# Altium PCB MCU_PCB_CH340.PcbDoc
Units mm, origin at the board's own origin, x right, y up, seen from the top; angles counter-clockwise.
Board outline 70.36 x 37.85 mm, 2 copper layers (Top Layer, Bottom Layer), stack 1.671 mm thick; 33 components, 26 nets, 130 pads, 156 vias.
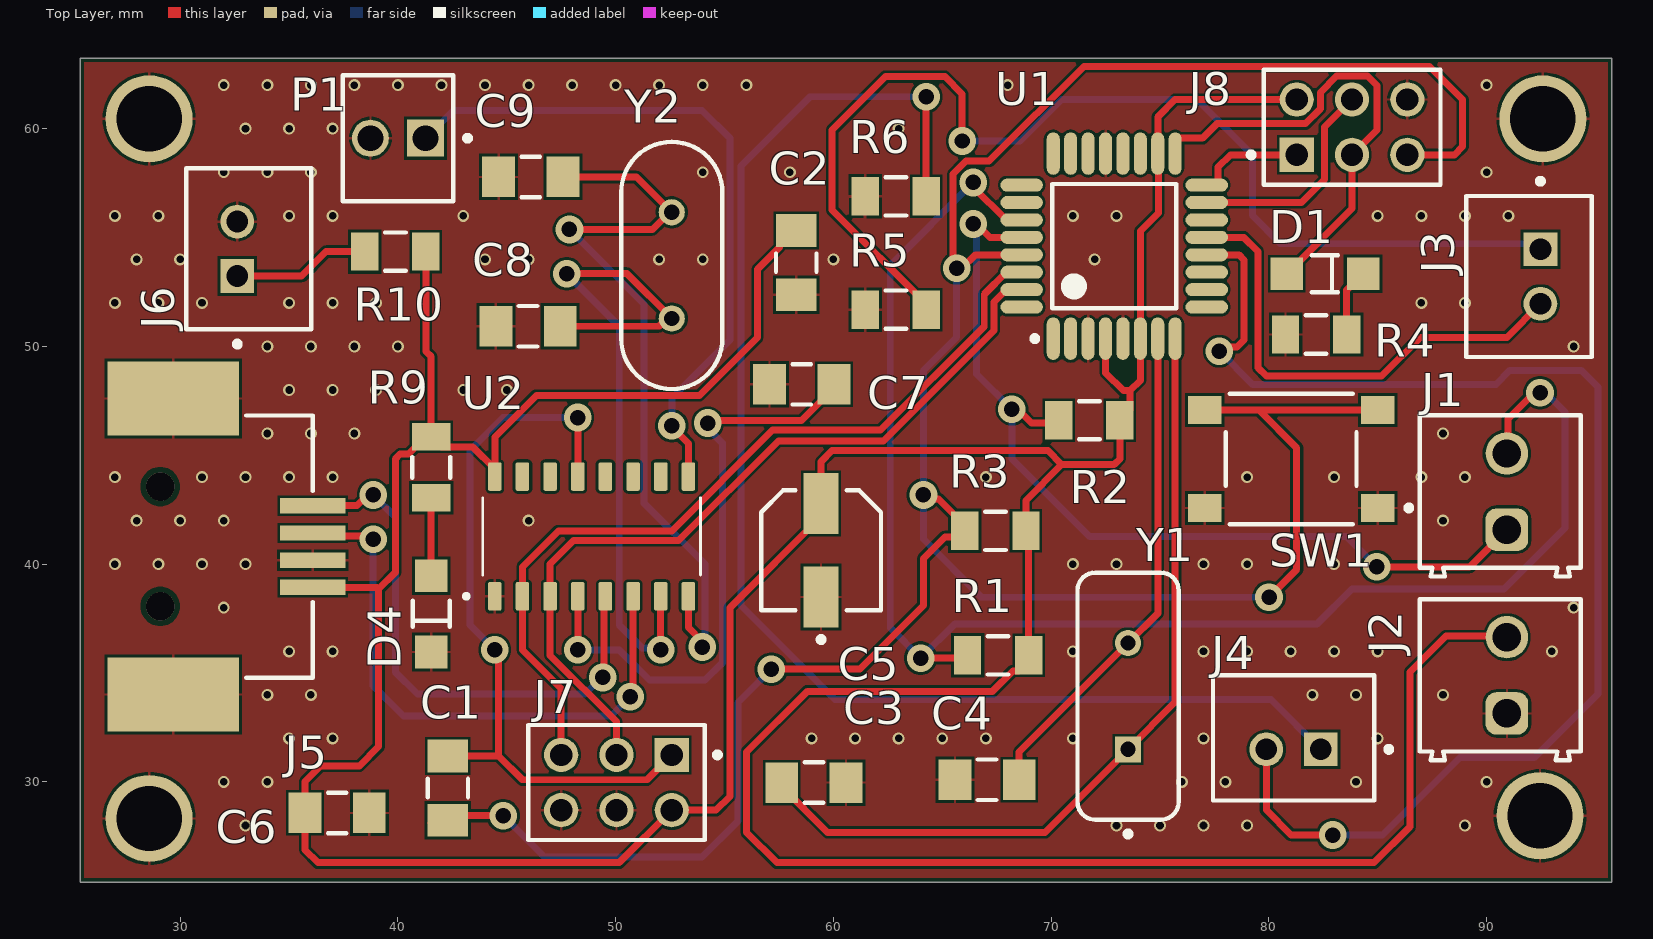
[diagram p0: Top Layer view]
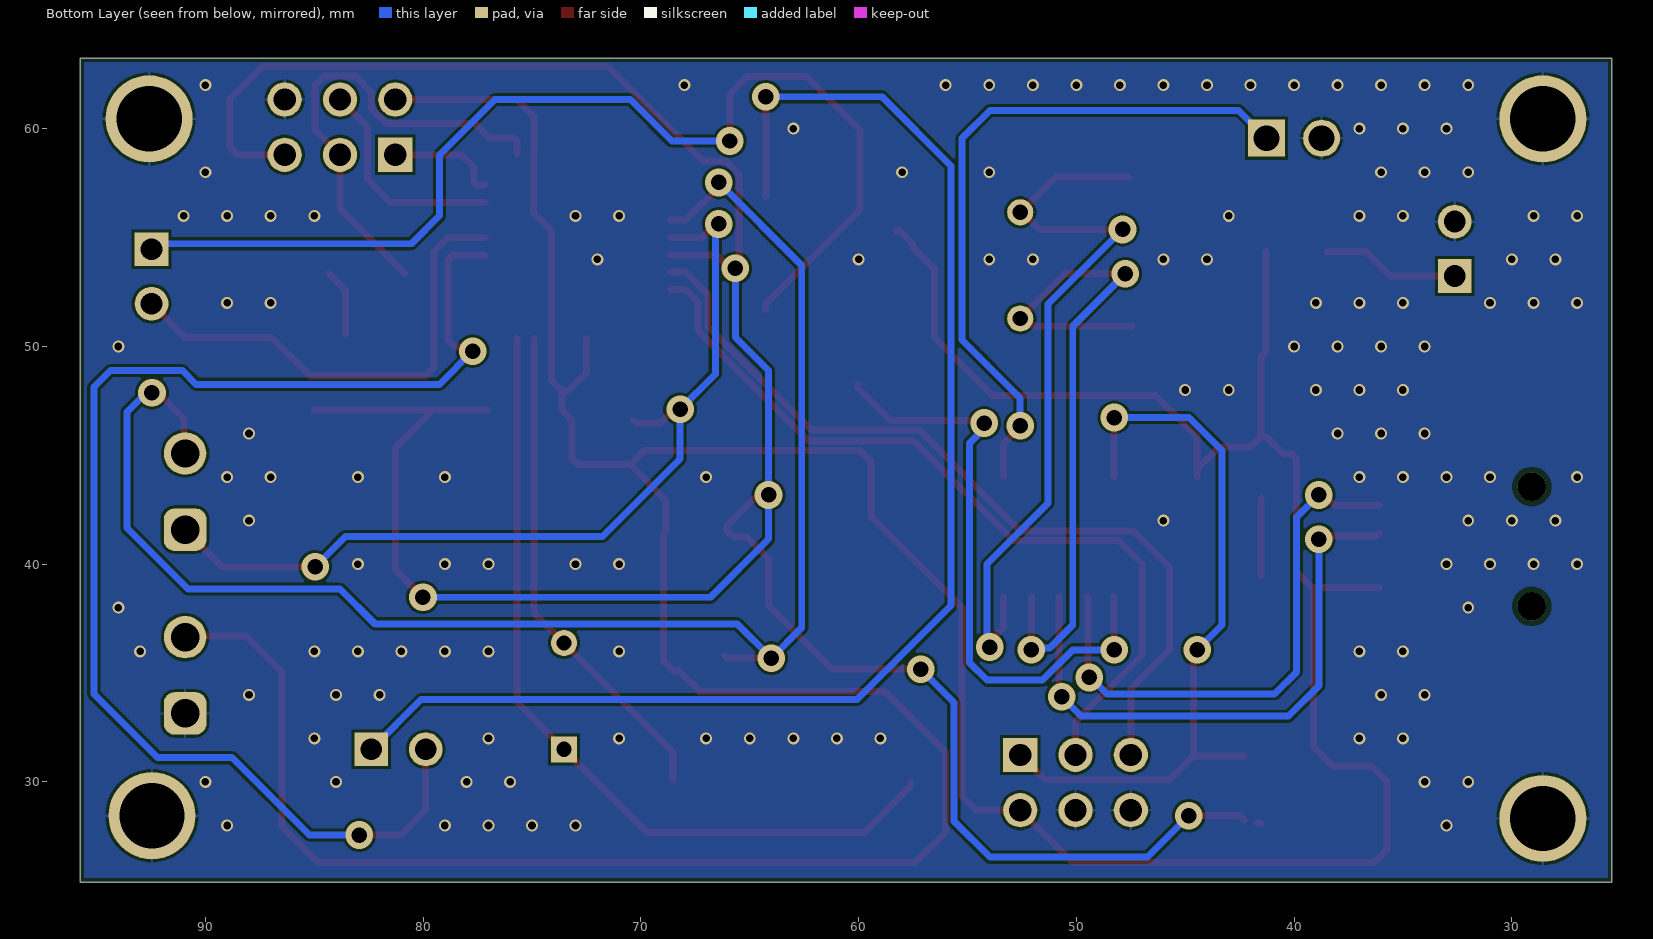
[diagram p1: Bottom Layer view, seen from below]
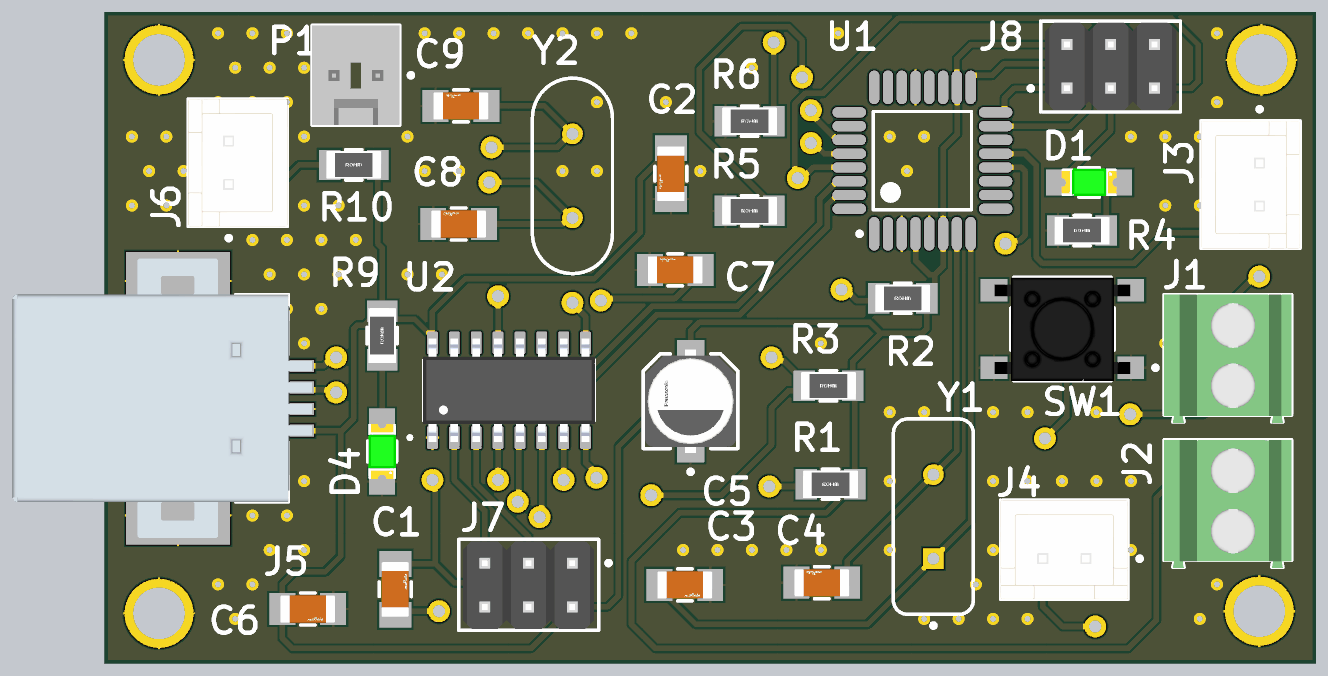
[diagram p2: 3D render of the assembled board from above, using the file's embedded part models]

## Layer stack, top to bottom
Top Solder: solder mask 0.0102, Solder Resist, Dk 3.5
Top Layer: signal copper 0.0356
Dielectric 1: dielectric 1.6, FR-4, Dk 4.8
Bottom Layer: signal copper 0.0356
Bottom Solder: solder mask 0.0102, Solder Resist, Dk 3.5

## Board outline
25.4,25.4 95.758,25.4 95.758,63.246 25.4,63.246

## Design rules (kind name [scope] priority, off if disabled: settings)
BoardOutlineClearance [All] p1: gap=0.2 ignorepadtopadclearanceinfootprint=FALSE
Clearance [All] p1: gap=0.127 ignorepadtopadclearanceinfootprint=FALSE except(0.25: Arc-Hole Track-Hole SMDPad-Hole THPad-Hole Via-Hole Fill-Hole Poly-Hole Region-Hole Text-Hole)
ComponentClearance [All] p1: gap=0.127 collisioncheckmode=3 verticalgap=0.127 showdistances=TRUE
DiffPairsRouting [All] p1: maxlimit=0.254 minlimit=0.127 mostfreqgap=0.127 toplayer_minwidth=0.127 toplayer_maxwidth=25.4 toplayer_prefwidth=0.127 bottomlayer_minwidth=0.127 bottomlayer_maxwidth=25.4 bottomlayer_prefwidth=0.127 maxuncoupledlength=12.7
Height [All] p1: minheight=0 maxheight=1816.048 prefheight=12.7
HoleSize [All] p1: absolutevalues=TRUE maxlimit=6.3 minlimit=0.3 maxpercent=80.000 minpercent=20.000
HoleToHoleClearance [All] p1: gap=0.25 allowstackedmicrovias=FALSE
MinimumAnnularRing [All] p1: minimumring=0.076
MinimumSolderMaskSliver [All] p1: minsoldermaskwidth=0
PlaneClearance [All] p1: clearance=0.127
PlaneConnect PlaneConnectPowerPads [InPadClass('PowerPads')] p1: planeconnectstyle=Direct reliefexpansion=0.508 reliefentries=4 reliefconductorwidth=0.254 reliefairgap=0.254
PlaneConnect [All] p2: pad.planeconnectstyle=Relief pad.reliefexpansion=0.3 pad.reliefentries=4 pad.reliefconductorwidth=0.127 pad.reliefairgap=0.127 via.planeconnectstyle=Direct via.reliefexpansion=0.3 via.reliefentries=4 via.reliefconductorwidth=0.127 via.reliefairgap=0.127
PolygonConnect PolygonConnectPowerPads [All vs (InPadClass('PowerPads'))] p1: connectstyle=Direct reliefconductorwidth=0.254 reliefentries=4 polygonreliefangle="90 Angle" airgapwidth=0.254
PolygonConnect [All] p2: thpad.connectstyle=Relief thpad.reliefconductorwidth=0.127 thpad.reliefentries=4 thpad.polygonreliefangle="90 Angle" thpad.airgapwidth=0.127 smdpad.connectstyle=Relief smdpad.reliefconductorwidth=0.127 smdpad.reliefentries=4 smdpad.polygonreliefangle="90 Angle" smdpad.airgapwidth=0.127 via.connectstyle=Direct via.reliefconductorwidth=0.127 via.reliefentries=4 via.polygonreliefangle="90 Angle" via.airgapwidth=0.127
RoutingVias [All] p1: holewidth=0.3 width=0.6 viastyle="Through Hole" minholewidth=0.3 minwidth=0.6 maxholewidth=0.6 maxwidth=6.6
SilkToSilkClearance [All] p1: silktosilkclearance=0
SilkToSolderMaskClearance [IsPad] p1: minsilkscreentomaskgap=0.127 clearancetoexposedcopper=TRUE
SolderMaskExpansion [All] p1: expansion=0.075 istentingtop=FALSE
Width [All] p1: maxlimit=25.4 minlimit=0.127 preferedwidth=0.127 minimp=50.000000 maximp=50.000000 favimp=50.000000
20 further rules are at their usual default settings.

## Classes and differential pairs
component class MCU: C1 C2 C3 C4 D1 J1 J2 J3 J4 J8 R1 R2 R3 R4 R5 R6 SW1 U1 Y1
component class CH340: C5 C6 C7 C8 C9 D4 J5 J6 J7 P1 R9 R10 U2 Y2

## Components (designator, comment, footprint, x,y, rotation, side; value= is the part's Value field where it differs from the comment)
C1 "GRM31M1X1H104JA01L" FP-GRM31M-0_15-IPC_A 42.291,29.718 r90 top
C2 "GRM31M1X1H104JA01L" FP-GRM31M-0_15-IPC_A 58.293,53.848 r270 top
C3 "GRM31M1X1H104JA01L" FP-GRM31M-0_15-IPC_A 59.103,29.972 r0 top
C4 "GRM31M1X1H104JA01L" FP-GRM31M-0_15-IPC_A 67.056,30.099 r180 top
C5 "EEE1VA100SR" FP-SC-MFG 59.436,40.64 r90 top
C6 "GRM31M1X1H104JA01L" FP-GRM31M-0_15-IPC_A 37.211,28.575 r0 top
C7 "GRM31M1X1H104JA01L" FP-GRM31M-0_15-IPC_A 58.547,48.26 r180 top
C8 "GRM31M1X1H104JA01L" FP-GRM31M-0_15-IPC_A 45.974,50.927 r180 top
C9 "GRM31M1X1H104JA01L" FP-GRM31M-0_15-IPC_A 46.101,57.785 r180 top
D1 "HSMG-C150" FP-HSMG-C150-MFG 82.578,53.34 r180 top
D4 "HSMG-C150" FP-HSMG-C150-MFG 41.529,37.719 r90 top
J1 "691214110002" 691214110002 90.632,43.335 r90 top
J2 "691214110002" 691214110002 90.632,34.897 r90 top
J3 "B2B-XH-A(LF)(SN)" FP-B2B-XH-A_LF_SN-MFG 91.948,53.213 r270 top
J4 "B2B-XH-A(LF)(SN)" FP-B2B-XH-A_LF_SN-MFG 81.133,32.021 r180 top
J5 "62910416121" 62910416121 28.083,40.811 r270 top
J6 "B2B-XH-A(LF)(SN)" FP-B2B-XH-A_LF_SN-MFG 33.147,54.483 r90 top
J7 "M20-9980346" FP-M20-9980346-MFG 50.038,29.972 r180 top
J8 "M20-9980346" FP-M20-9980346-MFG 83.82,60.071 r0 top
P1 "22-27-2021" MOLX-22-27-2021_V 40.005,59.563 r180 top
R1 "MCR18EZPF30R0" FP-MCR18-IPC_B 67.564,35.814 r0 top
R2 "MCR18EZPF30R0" FP-MCR18-IPC_B 71.755,46.609 r0 top
R3 "MCR18EZPF30R0" FP-MCR18-IPC_B 67.441,41.529 r0 top
R4 "MCR18EZPF30R0" FP-MCR18-IPC_B 82.169,50.546 r0 top
R5 "MCR18EZPF30R0" FP-MCR18-IPC_B 62.865,51.689 r0 top
R6 "MCR18EZPF30R0" FP-MCR18-IPC_B 62.865,56.896 r0 top
R9 "MCR18EZPF30R0" FP-MCR18-IPC_B 41.529,44.45 r90 top
R10 "MCR18EZPF30R0" FP-MCR18-IPC_B 39.882,54.356 r0 top
SW1 "PTS645SM43SMTR92LFS" FP-PTS645SM43SMTR92LFS-MFG 81.026,44.831 r180 top
U1 "ATmega328P-AU" 32A_M 72.898,54.61 r90 top
U2 "CH340G" SOIC127P600X180-16N 48.895,41.275 r90 top
Y1 "FOXSLF/160-20" FOX-FOXSLF160-20 73.533,33.936 r90 top
Y2 "FOXSLF/120-20" FOX-FOXSLF-2_V 52.578,53.721 r90 top value=12MHz

## Footprints (in the part's own frame and the unit in brackets; to place one, negate y for a bottom-side part, rotate by r counter-clockwise, add the part's x,y. Pads: shape width x height; smd on the part's side, far side on the other; paste and mask are expansions set on the pad)
32A_M [mm] "Thin QFP, 32-Leads, Body 7x7mm, Pitch 0.8mm, IPC Low Density"
  oval 1.95x0.6 smd: 1(-4.25,2.8) 2(-4.25,2) 3(-4.25,1.2) 4(-4.25,0.4) 5(-4.25,-0.4) 6(-4.25,-1.2) 7(-4.25,-2) 8(-4.25,-2.8) 17(4.25,-2.8) 18(4.25,-2) 19(4.25,-1.2) 20(4.25,-0.4) 21(4.25,0.4) 22(4.25,1.2) 23(4.25,2) 24(4.25,2.8)
  oval 0.6x1.95 smd: 9(-2.8,-4.25) 10(-2,-4.25) 11(-1.2,-4.25) 12(-0.4,-4.25) 13(0.4,-4.25) 14(1.2,-4.25) 15(2,-4.25) 16(2.8,-4.25) 25(2.8,4.25) 26(2,4.25) 27(1.2,4.25) 28(0.4,4.25) 29(-0.4,4.25) 30(-1.2,4.25) 31(-2,4.25) 32(-2.8,4.25)
  silkscreen extent -4.37,-2.85 2.85,3.77, body extent -3.5,-3.5 3.5,3.5, height 1.2
62910416121 [mm] "USB 2.0 Type B SMT Horizontal"
  rect 0.7x3 smd: 1(1.875,8) 2(-0.625,8) 3(-1.875,8) 4(0.625,8)
  round 1.3 hole 1.3 unplated: MH1(-2.75,1) MH2(2.75,1)
  rect 3.4x6.04 smd: Shell(-6.8,1.6) Shell(6.8,1.6)
  silkscreen extent -6.02,4.95 6.02,8, body extent -8.1,-8 8.1,9.39, height 11.16
691214110002 [mm] "3.50 mm Horizontal Entry Modular, 2p"
  rrect50% 1.95x1.95 hole 1.3: 1(-1.75,-0.3)
  round 1.95 hole 1.3: 2(1.75,-0.3)
  silkscreen extent -3.9,-3.7 3.5,3.7, body extent -3.95,-3.7 3.5,3.7, height 8.55
FOX-FOXSLF160-20 [mm] "THD, 2-Leads, Body 11.35x4.65mm"
  rect 1.2x1.2 hole 0.7: 1(-2.44,0)
  round 1.2 hole 0.7: 2(2.44,0)
  silkscreen extent -6.45,-2.32 5.68,2.32, body extent -5.67,-2.32 5.68,2.33, height 3.6
FOX-FOXSLF-2_V [mm] "THD, 2-Leads, Body 11.35x4.65mm, Pitch 4.88mm"
  round 1.2 hole 0.7: 1(-2.44,0) 2(2.44,0)
  silkscreen extent -5.68,-2.32 5.68,2.32, body extent -5.67,-2.32 5.68,2.32, height 3.6
FP-B2B-XH-A_LF_SN-MFG [mm]
  rect 1.55x1.55 hole 1 paste-2539.97 mask+0: 1(-1.25,0.525)
  round 1.55 hole 1 paste-2539.97 mask+0: 2(1.25,0.525)
  silkscreen extent -4.5,-2.88 3.7,2.88, body extent -3.8,-2.98 3.8,2.98, height 0.25
FP-GRM31M-0_15-IPC_A [mm]
  rect 1.506x1.858 smd paste+0 mask+0: 1(-1.476,0) 2(1.476,0)
  silkscreen extent -0.42,-0.93 0.42,0.93, body extent -2.73,-1.43 2.73,1.43, height 0.25
FP-HSMG-C150-MFG [mm]
  rect 1.5x1.5 smd paste+0 mask+0: 1(-1.75,0) 2(1.75,0)
  silkscreen extent -0.6,-0.85 0.6,0.85, body extent -2.6,-0.95 2.6,0.95, height 0.25
FP-M20-9980346-MFG [mm]
  rect 1.57x1.57 hole 1.02 paste-2539.97 mask+0: 1(-2.54,-1.27)
  round 1.57 hole 1.02 paste-2539.97 mask+0: 2(-2.54,1.27) 3(0,-1.27) 4(0,1.27) 5(2.54,-1.27) 6(2.54,1.27)
  silkscreen extent -4.76,-2.64 4.06,2.64, body extent -4.16,-2.74 4.16,2.74, height 0.25
FP-MCR18-IPC_B [mm]
  rect 1.256x1.758 smd paste+0 mask+0: 1(-1.401,0) 2(1.401,0)
  silkscreen extent -0.47,-0.88 0.47,0.88, body extent -2.28,-1.13 2.28,1.13, height 0.25
FP-PTS645SM43SMTR92LFS-MFG [mm]
  rect 1.55x1.3 smd paste+0 mask+0: 1(-3.975,2.25) 2(3.975,2.25) 3(-3.975,-2.25) 4(3.975,-2.25)
  silkscreen extent -5.53,-3 3,3, body extent -4.85,-3.1 4.85,3.1, height 0.25
FP-SC-MFG [mm]
  rect 2.8x1.6 smd paste+0 mask+0: 1(-2.15,0) 2(2.15,0)
  silkscreen extent -4.22,-2.75 2.75,2.75, body extent -3.8,-3 3.8,3, height 0.25
MOLX-22-27-2021_V [mm] "Header, 2-Leads, Body 5.8x5.08mm"
  rect 1.7x1.7 hole 1.19: 1(-1.27,0)
  round 1.7 hole 1.19: 2(1.27,0)
  silkscreen extent -3.32,-2.9 2.54,2.9, body extent -2.54,-2.9 2.54,2.9, height 11.72
SOIC127P600X180-16N [mm]
  rrect25% 1.31x0.62 smd: 1(-2.75,4.445) 2(-2.75,3.175) 3(-2.75,1.905) 4(-2.75,0.635) 5(-2.75,-0.635) 6(-2.75,-1.905) 7(-2.75,-3.175) 8(-2.75,-4.445) 9(2.75,-4.445) 10(2.75,-3.175) 11(2.75,-1.905) 12(2.75,-0.635) 13(2.75,0.635) 14(2.75,1.905) 15(2.75,3.175) 16(2.75,4.445)
  silkscreen extent -2.85,-5 1.78,5.85, body extent -3,-5 3,5, height 1.8

## Part data
C1 C6 C7: library part CMP-06035-007547-1, "Chip Multilayer Ceramic Capacitors for General Purpose, 1206, 0.10uF, SL, +350/-1000ppm/°C, 5%, 50V", Capacitance=0.1uF, Case Code (Imperial)=1206, Case Code (Metric)=3216, Dielectric Material=Ceramic, Max Operating Temperature=125°C, Min Operating Temperature=-55°C, Temperature Coefficient=-1000ppm/°C, Tolerance=5%, Voltage=50V, Case/Package=1206, Depth=1.6mm, Dissipation Factor=0.025%, Height=1.15mm, Length=0.126inch, Mount="Surface Mount", Packaging="Tape and Reel", Termination=SMD/SMT, Thickness=0.049inch, Voltage Rating=50V, Voltage Rating (DC)=50V, Width=0.063inch
C2: library part CMP-06035-007547-1, "Chip Multilayer Ceramic Capacitors for General Purpose, 1206, 0.10uF, SL, +350/-1000ppm/°C, 5%, 50V", Capacitance=10uF, Case Code (Imperial)=1206, Case Code (Metric)=3216, Dielectric Material=Ceramic, Max Operating Temperature=125°C, Min Operating Temperature=-55°C, Temperature Coefficient=-1000ppm/°C, Tolerance=5%, Voltage=50V, Case/Package=1206, Depth=1.6mm, Dissipation Factor=0.025%, Height=1.15mm, Length=0.126inch, Mount="Surface Mount", Packaging="Tape and Reel", Termination=SMD/SMT, Thickness=0.049inch, Voltage Rating=50V, Voltage Rating (DC)=50V, Width=0.063inch
C3 C4 C8 C9: library part CMP-06035-007547-1, "Chip Multilayer Ceramic Capacitors for General Purpose, 1206, 0.10uF, SL, +350/-1000ppm/°C, 5%, 50V", Capacitance=22pF, Case Code (Imperial)=1206, Case Code (Metric)=3216, Dielectric Material=Ceramic, Max Operating Temperature=125°C, Min Operating Temperature=-55°C, Temperature Coefficient=-1000ppm/°C, Tolerance=5%, Voltage=50V, Case/Package=1206, Depth=1.6mm, Dissipation Factor=0.025%, Height=1.15mm, Length=0.126inch, Mount="Surface Mount", Packaging="Tape and Reel", Termination=SMD/SMT, Thickness=0.049inch, Voltage Rating=50V, Voltage Rating (DC)=50V, Width=0.063inch
C5: library part CMP-05427-000087-1, "CAP ALUM 10UF 20% 35V SMD", Capacitance=10uF, Case/Package=Radial, Leakage Current=3uA, Max Operating Temperature=85°C, Min Operating Temperature=-40°C, Package Quantity=1, Ripple Current=30mA, Tolerance=20%, Voltage=35V, Construction=Cylindrical, Contact Plating=Tin, Diameter=5mm, Height=5.4mm, Height - Seated (Max)=0.213inch, Lead Length=2.2mm, Lead Pitch=1.5mm, Length=5.5mm, Life (Hours)=2000Hour, Mount="Surface Mount", Number of Pins=2, Packaging="Tape and Reel", Radiation Hardening=No, REACH SVHC="No SVHC", Ripple Current (AC)=30mA, RoHS Compliant=Yes, Series=S, Termination=SMD/SMT, Voltage Rating=35V, Voltage Rating (DC)=35V, Width=5.3mm
D1: library part CMP-2000-05061-2, "LED GREEN DIFFUSED 1206 SMD", Color="Green LED", Colour=Green, Forward Current=20mA, Forward Voltage=2.2V, Manufacturer=Broadcom, Max Junction Temp=+95°C, Power Dissipation=65mW, Reverse Voltage=5V, Temperature="-40°C to +85°C", Temperature Range High=+85°C, Temperature Range Low=-40°C, Automotive=No, Category=Diode, ComponentLink2Description=Datasheet, ComponentLink2URL=https://docs.broadcom.com/docs/AV02-0551EN, Device Class L1=Optoelectronics, Device Class L2=LEDs, Device Class L3=unset, Digikey Description="LED GREEN DIFFUSED 1206 SMD", Height=1.2mm, Ipc Land Pattern Name=DIOCP320160X55, Lead Free=Yes, Led Orientation="Top View", Luminous Intensity=15mcd, Manufacturer Part Number=HSMG-C150, Mouser Description="LED Uni-Color Green 570nm 2-Pin Chip LED T/R", Octopart=https://octopart.com/hsmg-c150-broadcom-71131304, Package=HSMG-C150, Peak Emmision Wavelength=570nm, RoHS=TRUE, Viewing Angle=170°, Wavelength=572nm
D4: library part CMP-2000-05061-2, "LED GREEN DIFFUSED 1206 SMD", Color="Power LED", Colour=Green, Forward Current=20mA, Forward Voltage=2.2V, Manufacturer=Broadcom, Max Junction Temp=+95°C, Power Dissipation=65mW, Reverse Voltage=5V, Temperature="-40°C to +85°C", Temperature Range High=+85°C, Temperature Range Low=-40°C, Automotive=No, Category=Diode, ComponentLink2Description=Datasheet, ComponentLink2URL=https://docs.broadcom.com/docs/AV02-0551EN, Device Class L1=Optoelectronics, Device Class L2=LEDs, Device Class L3=unset, Digikey Description="LED GREEN DIFFUSED 1206 SMD", Height=1.2mm, Ipc Land Pattern Name=DIOCP320160X55, Lead Free=Yes, Led Orientation="Top View", Luminous Intensity=15mcd, Manufacturer Part Number=HSMG-C150, Mouser Description="LED Uni-Color Green 570nm 2-Pin Chip LED T/R", Octopart=https://octopart.com/hsmg-c150-broadcom-71131304, Package=HSMG-C150, Peak Emmision Wavelength=570nm, RoHS=TRUE, Viewing Angle=170°, Wavelength=572nm
J1 J2: library part CMP-1502-02464-2, Color="Blue, Green", Current=10A, Max Operating Temperature=105°C, Min Operating Temperature=-40°C, Voltage=300V, Contact Material=Brass, Contact Plating="Brass, Tin", Current Rating=10A, Height=8.7mm, Housing Material=Nylon, Lead Pitch=3.5mm, Length=7.4mm, Mount="Through Hole", NexarPartId=18818288, Number of Contacts=2, Number of Levels=1, Number of Pins=2, Number of Positions Per Level=2, Number of Rows=1, Packaging=Box, Pitch=3.5052mm, Plating="Brass, Steel", REACH SVHC=Unknown, RoHS=Compliant, Stripping Length=-6mm, Termination=Screw, Voltage Rating=300V, Width=7.9mm, Wire Gauge (Max)=24AWG, Wire Gauge (Min)=16AWG, Wire/Cable Gauge=24AWG
J3 J4 J6: library part CMP-2000-05888-3, "CONN HEADER VERT 2POS 2.5MM", Color=Natural, Contact Resistance=20mR, Current Rating=3A, Housing Color=White, Insulation Resistance=1GR, Max Operating Temperature=85°C, Max Voltage Rating (AC)=250V, Min Operating Temperature=-25°C, Connector Type="Male Pin", Contact Material=Brass, Contact Plating=Tin, Contact Type="Male Pin", Depth=5.75mm, Fastening Type=Detent, Housing Material=Polyamide, Lead Free="Lead Free", Lead Pitch=2.5mm, Length=7.4mm, Max Current Rating=3A, Max Voltage Rating (DC)=250V, Mount="Through Hole", Number of Contacts=2, Number of Positions=2, Number of Rows=1, Orientation=Straight, Packaging=Bulk, Pitch=2.5mm, REACH SVHC="No SVHC", Series=XH, Termination=Solder, Voltage Rating=250V, Voltage Rating (AC)=250V, Wire/Cable Gauge=22AWG
J5: library part CMP-1502-03244-2, Contact Resistance=20mΩ, Current Rating=1.5A, Insulation Resistance=1GΩ, Max Operating Temperature=105°C, Min Operating Temperature=-40°C, Operating Supply Voltage=30V, Connector Type=USB, Contact Plating=Gold, Features=Shielded, Gender=Receptacle, Lead Free="Lead Free", Length=16mm, Mount="Horizontal, Surface Mount", NexarPartId=19991172, Number of Contacts=4, Number of Pins=4, Orientation=Horizontal, Packaging="Tape and Reel", REACH SVHC=Unknown, RoHS=Compliant, Termination=SMD/SMT, USB Standard="USB 2.0"
J7 J8: library part CMP-2000-06636-2, "CONN HEADER VERT 6POS 2.54MM", Current Rating=3A, Manufacturer=Harwin, Temperature="-40°C to +105°C", Temperature Range High=+105°C, Temperature Range Low=-40°C, Automotive=No, Category=Conn, ComponentLink2Description=Datasheet, ComponentLink2URL=https://cdn.harwin.com/pdfs/M20-998.pdf, Conn Gender=Male, Conn Orientation=Vertical, Contact Material=Tin,Nickel, Device Class L1=Connectors, Device Class L2="Headers and Wire Housings", Device Class L3=unset, Digikey Description="CONN HEADER VERT 6POS 2.54MM", Height=8.99mm, Lead Free=Yes, Manufacturer Part Number=M20-9980346, Mouser Description="2.54mm (0.1\") Pitch DIL Vertical PC Tail Pin Header, 6.1mm mating pin height, tin, 3+3 contacts", Number of Contacts=6, Number of Rows=2, Octopart=https://octopart.com/m20-9980346-harwin-5436545, Package=M20-9980346, Pitch=2.54mm, RoHS=TRUE
P1: library part CMP-2000-05537-1, "Male Header, Pitch 2.54 mm, 1 x 2 Position, Height 11.7 mm, Tail Length 3.56 mm, 0 to 75 degC, RoHS, Bulk", Current - Max=4A, Manufacturer=Molex, Operating temperature=0°Cto+75°C, Package Description="2-Leads Header, Body 5.08 x 5.8 mm, Pitch 2.54 mm", Package Version="Rev. BC, 02/2012", PartNumber=0022272021, Voltage - Max=250V, Contact Material=Tinplatedbrass, Current Rating=4A, Datasheet URL=http://www.molex.com/pdm_docs/sd/022272021_sd.pdf, Datasheet Version="Rev. F, 06/2009", Housing Material=Nylon(UL94V-0), Manufacturer URL=http://www.molex.com/, Mounting Technology=ThroughHole, No. of Positions=2, No. of Rows=1, Orientation=Vertical, Package Reference=22-27-2021, Pitch=2.54mm, Voltage Rating=250V
R1 R2 R3 R9: library part CMP-08839-012195-1, "Thick Film Chip Resistor, 1206, 30Ω, 1%, 100ppm/°C, 0.25W, 200V", Case Code (Imperial)=1206, Case Code (Metric)=3216, Max Power Dissipation=250mW, Package Quantity=5000, Resistance=1k, Resistor Type="Thick Film", Temperature Coefficient=100ppm/°C, Tolerance=1%, Voltage Rating (DC)=200V, Case/Package=1206, Features="Automotive AEC-Q200", Height=0.026inch, Lead Free="Lead Free", Length=0.126inch, Number of Terminations=2, Packaging="Tape and Reel", RoHS Compliant=Yes, Series=MCR18, Width=0.063inch
R4 R5 R6 R10: library part CMP-08839-012195-1, "Thick Film Chip Resistor, 1206, 30Ω, 1%, 100ppm/°C, 0.25W, 200V", Case Code (Imperial)=1206, Case Code (Metric)=3216, Max Power Dissipation=250mW, Package Quantity=5000, Resistance=330, Resistor Type="Thick Film", Temperature Coefficient=100ppm/°C, Tolerance=1%, Voltage Rating (DC)=200V, Case/Package=1206, Features="Automotive AEC-Q200", Height=0.026inch, Lead Free="Lead Free", Length=0.126inch, Number of Terminations=2, Packaging="Tape and Reel", RoHS Compliant=Yes, Series=MCR18, Width=0.063inch
SW1: library part CMP-2000-05160-2, "SWITCH TACTILE SPST-NO 0.05A 12V", Case/Package=SMD/SMT, Color=Black, Contact Resistance=100mR, Current Rating=50mA, Max Operating Temperature=60°C, Max Voltage Rating (DC)=12V, Min Operating Temperature=-20°C, Operating Force=160gf, Package Quantity=1, Actuator Length=0.85mm, Actuator Material=Nylon, Actuator Type=Standard, Contact Material=Silver, Contact Plating=Silver, Depth=9mm, Illumination Type=Non-Illuminated, Lead Free="Lead Free", Length=6mm, Max Current Rating=50mA, Mechanical Life=100000Cycles, Mount="Surface Mount", Orientation=Straight, Packaging="Tape and Reel", REACH SVHC="No SVHC", Switch Function=Off-Mom, Termination="Gull Wing", Throw Configuration=SPST, Voltage Rating (DC)=12V
U1: library part CMP-0095-00269-2, "8-bit AVR Microcontroller, 32KB Flash, 1KB EEPROM, 2KB SRAM, 32-pin TQFP, Industrial Grade (-40°C to 85°C)", Code_JEDEC=MS-026-ABA, ComponentLink1Description="Manufacturer URL", ComponentLink1URL=http://www.atmel.com/, ComponentLink2Description="ATmega48A/48PA/88A/88PA/168A/168PA/328/328P Datasheet", ComponentLink2URL=http://www.atmel.com/dyn/resources/prod_documents/doc8271.pdf, ComponentLink3Description="ATmega48A/48PA/88A/88PA/168A/168PA/328/328P Summary", ComponentLink3URL=http://www.atmel.com/dyn/resources/prod_documents/8271S.pdf, DatasheetVersion="revD, May-2011", PackageDescription="32-Lead, 7x7x1.0 mm Body, 0.8mm Lead Pitch, Thin Profile Plastic Quad Flat Package (TQFP)", PackageReference=32A, PackageVersion="revC, Oct-2010", RevisionNote="DatasheetVersion & PackageVersion updated. URLs added."
U2: "USB Interface Integrated Circuit", Package=None, Availability="Not in stock", Check_prices=https://www.snapeda.com/parts/Ch340G/WCH/view-part/?ref=eda, MF=WCH, MP=Ch340G, Price=None, SnapEDA_Link=https://www.snapeda.com/parts/Ch340G/WCH/view-part/?ref=snap
Y1: library part CMP-1749-00003-1, "Resistance Weld Thru-Hole Crystal, 16 MHz, -20 to 70 degC, 2-Pin THD, RoHS, Bulk", Case\Package=Axial, Frequency=16MHz, Max Operating Temperature="155 degC", Min Operating Temperature="-55 degC", Package Quantity=200, Power Rating="250 mW", Resistance="221 kohm", Tolerance=1%, Voltage Rating="250 V", ComponentLink1Description="Manufacturer URL", ComponentLink1URL=http://www.foxonline.com/, ComponentLink2Description=Datasheet, ComponentLink2URL=http://www.foxonline.com/pdfs/hc49slf.pdf, DatasheetVersion=Mar-15, Length="0.248 inch", Mount="Through Hole", PackageDescription="2-Pin Through Hole Device, Body 11.35 x 4.65 mm", PackageReference=FOXSLF160-20, Packaging=Bulk, RoHSCompliant=true
Y2: library part CMP-1749-00004-1, "Resistance Weld Thru-Hole Crystal, 12 MHz, +/-30 ppm, -20 to 70 degC, 2-Pin THD, RoHS, Bulk", Case\Package=TO-251-3, Input Capacitance="350 pF", Max Operating Temperature="150 degC", Max Power Dissipation="2.5 W", Min Operating Temperature="-55 degC", Package Quantity=70, ComponentLink1Description="Manufacturer URL", ComponentLink1URL=http://www.foxonline.com/, ComponentLink2Description=Datasheet, ComponentLink2URL=http://www.foxonline.com/pdfs/hc49slf.pdf, DatasheetVersion=Mar-15, Elements=1, Height="6.1 mm", Length="6.6 mm", Mount="Through Hole", PackageDescription="2-Pin Through Hole Device, Body 11.35 x 4.65 mm, Pitch 4.88 mm", PackageReference=FOXSLF-2, Packaging=Rail/Tube, Pins=3, Radiation Hardening=No, Rds On Max="115 mohm", REACH SVHC="No SVHC", RoHSCompliant=true, Typical Rise Time="90 ns", Width="2.3 mm"

## Free pads (board coordinates)
  round 4 hole 3: 6(92.583,60.452) 7(92.456,28.448) 8(28.575,60.452) 9(28.575,28.321)

## Via types
v1: diameter 0.55, hole 0.35, Top Layer to Bottom Layer, 128 vias
v2: diameter 1.27, hole 0.711, Top Layer to Bottom Layer, 28 vias

## Nets (pads, with @x,y where several pads share a name; then routed paths per layer and width w, separated by ;. In a path a pad name is that pad's centre, name@x,y a point inside that pad or via, vN(x,y) a via of type N, cw(c..) or ccw(c..) an arc to the next point about the centre after c; other vN are vias at no path point)
+5V: C2.1 C5.2 C6.1 J2.2 J5.1 J7.2 J8.2 R1.2 R2.2 R3.2 R9.2 R10.2 U1.4 U1.6 U1.18 U2.16 | length 210.3
  Top Layer w0.32: J5.1 39.042,38.936 39.116,38.862 ; R10.2 41.283,49.776 41.529,49.53 R9.2 ; U2.16 U2.16@44.45,44.37 ; C2.1 58.117,55.324 57.524,54.731 57.524,54.555 56.515,53.546 56.515,50.419 53.848,47.752 46.355,47.752 44.45,45.847 U2.16@44.45,44.37 ; U1.4 72.498,48.787 73.315,47.97 73.624,47.97 ; J8.2 75.692,61.341 74.898,60.547 U1.18 74.93,58.828 74.93,56.134 74.098,55.302 U1.6 74.098,48.444 73.624,47.97 ; J2.2 90.876,36.703 88.138,36.703 86.487,35.052 86.487,27.94 84.836,26.289 57.404,26.289 56.007,27.686 56.007,31.369 58.801,34.163 67.314,34.163 68.246,35.095 68.497,35.095 68.965,35.563 R1.2 68.965,41.406 R3.2 68.842,42.934 70.485,44.577 ; 39.116,38.862 39.116,31.623 38.227,30.734 36.449,30.734 35.735,30.02 C6.1 35.735,26.876 36.322,26.289 50.165,26.289 J7.2 54.61,28.702 55.245,29.337 55.245,37.999 59.436,42.19 C5.2 59.436,44.704 59.944,45.212 69.85,45.212 70.485,44.577 ; 39.116,38.862 39.878,39.624 39.878,44.831 40.104,45.057 40.484,45.057 41.278,45.851 R9.2 ; R9.2 41.997,45.383 43.437,45.383 U2.16@44.45,44.37 ; 70.485,44.577 72.898,44.577 73.156,44.835 R2.2 73.624,47.077 73.624,47.97
D+: J5.3 U2.5 | length 25.6
  Top Layer w0.32: J5.3 38.111,42.686 38.605,43.18 v2(38.862,43.18) ; v2(49.403,34.798) 49.466,34.861 49.466,38.462 U2.5
  Bottom Layer w0.32: v2(38.862,43.18) 39.878,42.164 39.878,35.052 40.894,34.036 48.588,34.036 49.35,34.798 v2(49.403,34.798)
D-: J5.2 U2.6 | length 27.1
  Top Layer w0.32: J5.2 36.227,41.292 38.718,41.292 v2(38.862,41.148) ; v2(50.673,33.909) 50.8,34.036 U2.6
  Bottom Layer w0.32: v2(38.862,41.148) 38.862,34.417 40.259,33.02 49.784,33.02 v2(50.673,33.909)
DTR: C1.2 J7.1 U2.13 | length 34.1
  Top Layer w0.32: C1.2 44.625,31.194 ; v2(44.45,36.068) 44.625,35.893 44.625,31.194 ; U2.13 v2(48.26,46.736) ; J7.1 51.435,30.099 45.72,30.099 44.625,31.194
  Bottom Layer w0.32: v2(44.45,36.068) 43.307,37.211 43.307,45.212 44.831,46.736 v2(48.26,46.736)
GND: C2.2 C3.2 C4.2 C5.1 C6.2 C7.2 C8.2 C9.2 D4.1 J2.1 J5.4 J5.Shell J6.2 J7.4 J7.6 J8.6 P1.2 pad.6 pad.7 pad.8 pad.9 R4.1 R5.1 R6.1 SW1.1 SW1.2 U1.3 U1.5 U1.21 U2.1
  other v1: 33,28 73,28 75,28 77,28 79,28 89,28 32,30 34,30 76,30 78,30 84,30 90,30 35,32 37,32 59,32 61,32 63,32 65,32 67,32 71,32 77,32 85,32 34,34 36,34 82,34 84,34 88,34 35,36 37,36 71,36 77,36 79,36 81,36 83,36 85,36 93,36 32,38 94,38 27,40 29,40 31,40 33,40 71,40 73,40 77,40 79,40 83,40 28,42 30,42 32,42 46,42 88,42 27,44 31,44 33,44 35,44 37,44 67,44 79,44 83,44 87,44 89,44 34,46 36,46 38,46 88,46 35,48 37,48 39,48 43,48 45,48 34,50 36,50 38,50 40,50 94,50 27,52 29,52 31,52 35,52 37,52 39,52 87,52 89,52 28,54 30,54 44,54 46,54 52,54 54,54 60,54 72,54 27,56 29,56 35,56 37,56 43,56 71,56 73,56 85,56 87,56 89,56 91,56 32,58 34,58 36,58 54,58 58,58 90,58 33,60 35,60 37,60 63,60 32,62 34,62 36,62 38,62 40,62 42,62 44,62 46,62 48,62 50,62 52,62 54,62 56,62 68,62 90,62
MISO: J8.1 U1.16 | length 5.1
  Top Layer w0.32: U1.16 77.534,57.41 77.663,57.539 77.663,58.232 78.232,58.801 J8.1
MOSI: J8.4 U1.15 | length 10
  Top Layer w0.32: U1.15 81.502,56.61 82.55,57.658 82.55,60.071 J8.4
NetC3_1: C3.1 U1.8 Y1.1 | length 38.3
  Top Layer w0.32: C3.1 57.627,29.796 59.736,27.686 69.723,27.686 Y1.1 75.698,33.661 U1.8
NetC4_1: C4.1 U1.7 Y1.2 | length 22.9
  Top Layer w0.32: C4.1 68.532,31.375 Y1.2 74.898,37.741 U1.7
NetC7_1: C7.1 U2.4 | length 27.9
  Top Layer w0.32: v2(48.26,36.068) U2.4 ; v2(54.229,46.482) 54.349,46.602 58.541,46.602 60.023,48.084 C7.1
  Bottom Layer w0.32: v2(48.26,36.068) 50.165,36.068 51.562,34.671 54.102,34.671 54.897,35.466 54.897,45.573 54.229,46.241 v2(54.229,46.482)
NetC8_1: C8.1 U2.7 Y2.1 | length 32.9
  Top Layer w0.32: C8.1 51.986,50.927 52.34,51.281 Y2.1 50.519,53.34 v2(47.752,53.34) ; v2(52.07,36.068) U2.7
  Bottom Layer w0.32: v2(47.752,53.34) 50.165,50.927 50.165,37.211 51.221,36.155 51.983,36.155 v2(52.07,36.068)
NetC9_1: C9.1 U2.8 Y2.2 | length 35.1
  Top Layer w0.32: C9.1 50.954,57.785 Y2.2 52.478,56.161 51.689,55.372 v2(47.879,55.372) ; U2.8 53.34,37.087 53.975,36.452 v2(53.975,36.195)
  Bottom Layer w0.32: v2(47.879,55.372) 51.308,51.943 51.308,42.799 54.102,40.005 54.102,36.322 v2(53.975,36.195)
NetD1_1: D1.1 R4.2 | length 3.1
  Top Layer w0.32: R4.2 83.57,52.582 D1.1
NetD4_2: D4.2 R9.1 | length 3.6
  Top Layer w0.32: D4.2 R9.1
NetJ3_1: J3.1 R5.2 | length 51.4
  Top Layer w0.32: R5.2 64.266,51.94 59.944,56.262 59.944,59.944 62.39,62.39 65.118,62.39 65.913,61.595 v2(65.913,59.436)
  Bottom Layer w0.32: v2(65.913,59.436) 68.58,59.436 70.485,61.341 76.708,61.341 79.248,58.801 79.248,56.007 80.538,54.717 92.219,54.717 J3.1
NetJ3_2: J3.2 U1.13 | length 22.5
  Top Layer w0.32: U1.13 78.848,55.01 79.502,54.356 79.502,49.022 79.883,48.641 85.18,48.641 86.958,50.419 90.929,50.419 J3.2
NetJ4_1: J4.1 R6.2 | length 64
  Top Layer w0.32: v2(64.262,61.468) 64.262,56.9 R6.2
  Bottom Layer w0.32: v2(64.262,61.468) 58.928,61.468 55.753,58.293 55.753,38.1 60.071,33.782 80.097,33.782 J4.1
NetJ4_2: J4.2 U1.12 | length 60.7
  Top Layer w0.32: U1.12 78.632,54.21 78.867,53.975 78.867,50.292 78.541,49.966 77.906,49.966 v2(77.724,49.784) ; J4.2 79.883,28.702 81.026,27.559 v2(82.931,27.559)
  Bottom Layer w0.32: v2(77.724,49.784) 79.248,48.26 90.424,48.26 91.059,48.895 94.361,48.895 95.123,48.133 95.123,34.036 92.202,31.115 88.773,31.115 85.217,27.559 v2(82.931,27.559)
NetJ6_1: J6.1 R10.1 | length 6.3
  Top Layer w0.32: J6.1 35.58,53.233 36.703,54.356 R10.1
NetP1_1: P1.1 U2.9 | length 32
  Top Layer w0.32: v2(52.578,46.355) 52.578,46.302 53.34,45.54 U2.9
  Bottom Layer w0.32: P1.1 42.545,60.833 53.975,60.833 55.245,59.563 55.245,50.292 52.578,47.625 v2(52.578,46.355)
RESET: C1.1 J8.5 R3.1 SW1.3 SW1.4 U1.29 | length 124.6
  Top Layer w0.32: C1.1@41.529,28.115 C1.1@41.705,28.115 ; C1.1 42.497,28.448 v2(44.831,28.448) ; v2(57.15,35.179) 61.214,35.179 64.135,38.1 64.135,40.259 65.12,41.244 65.755,41.244 R3.1 66.04,41.78 64.822,42.998 64.317,42.998 v2(64.135,43.18) ; U1.29 66.532,54.21 65.916,53.594 v2(65.659,53.594) 65.499,53.754 65.499,57.913 66.1,58.514 67.15,58.514 71.501,62.865 87.376,62.865 88.9,61.341 88.9,59.182 88.519,58.801 J8.5 ; SW1.4 79.538,47.081 ; v2(80.01,38.481) 81.28,39.751 81.28,45.339 79.538,47.081 ; SW1.3 79.538,47.081
  Bottom Layer w0.32: v2(44.831,28.448) 46.736,26.543 53.975,26.543 55.626,28.194 55.626,33.655 v2(57.15,35.179) ; v2(65.659,53.594) 65.659,50.419 64.135,48.895 v2(64.135,43.18) 64.135,41.148 66.802,38.481 v2(80.01,38.481)
RXI: J7.3 U1.31 U2.3 | length 37.7
  Top Layer w0.32: J7.3 50.038,32.766 46.99,35.814 U2.3 46.99,40.012 48.06,41.082 52.894,41.082 57.471,45.659 62.305,45.659 67.376,50.73 67.376,52.043 67.943,52.61 U1.31
SCK: D1.2 J8.3 U1.17 | length 22
  Top Layer w0.32: U1.17 75.698,59.434 75.827,59.563 76.962,59.563 77.629,60.23 81.685,60.23 82.372,60.916 82.372,61.671 83.114,62.413 84.526,62.413 84.963,61.976 84.963,59.944 J8.3 83.82,56.332 D1.2
SCL: J1.1 R2.1 U1.28 | length 42
  Top Layer w0.32: v2(66.421,55.626) 66.577,55.626 67.193,55.01 U1.28 ; v2(68.199,47.117) 68.456,47.117 69.091,46.482 70.227,46.482 R2.1 ; v2(84.963,39.878) 89.225,39.878 J1.1
  Bottom Layer w0.32: v2(66.421,55.626) 66.581,55.466 66.581,48.735 v2(68.199,47.117) 68.199,44.831 71.755,41.275 83.566,41.275 v2(84.963,39.878)
SDA: J1.2 R1.1 U1.27 | length 71.8
  Top Layer w0.32: v2(64.008,35.687) 66.036,35.687 R1.1 ; v2(66.421,57.531) 66.421,57.332 67.943,55.81 U1.27 ; J1.2 90.993,45.146 90.993,46.673 92.199,47.879 v2(92.456,47.879)
  Bottom Layer w0.32: v2(66.421,57.531) 62.611,53.721 62.611,37.084 v2(64.008,35.687) 65.584,37.263 82.221,37.263 83.82,38.862 90.805,38.862 93.599,41.656 93.599,46.993 92.713,47.879 v2(92.456,47.879)
TXO: J7.5 U1.30 U2.2 | length 38.8
  Top Layer w0.32: J7.5 47.498,34.29 45.72,36.068 U2.2 45.72,39.878 47.371,41.529 52.578,41.529 57.204,46.155 62.169,46.155 66.929,50.915 66.929,52.396 67.943,53.41 U1.30
pads on no net: J5.MH1 J5.MH2 U1.1 U1.2 U1.9 U1.10 U1.11 U1.14 U1.19 U1.20 U1.22 U1.23 U1.24 U1.25 U1.26 U1.32 U2.10 U2.11 U2.12 U2.14 U2.15

## Polygon pours and split planes (outlines as drawn)
GND on Top Layer "GND" (solid, pour order 1): 25.4,63.246 95.504,63.246 95.631,63.373 95.758,63.246 95.758,25.527 25.4,25.527
GND on Bottom Layer "GND" (solid, pour order 0): 25.4,63.246 95.758,63.246 95.758,25.4 25.4,25.4